# Altium PCB gnss_module_evaluation_shield_pcb.PcbDoc
Units mm, origin at the board's own origin, x right, y up, seen from the top; angles counter-clockwise.
Board outline 108.58 x 80 mm, 2 copper layers (Top Layer, Bottom Layer); 35 components, 33 nets, 116 pads, 132 vias.
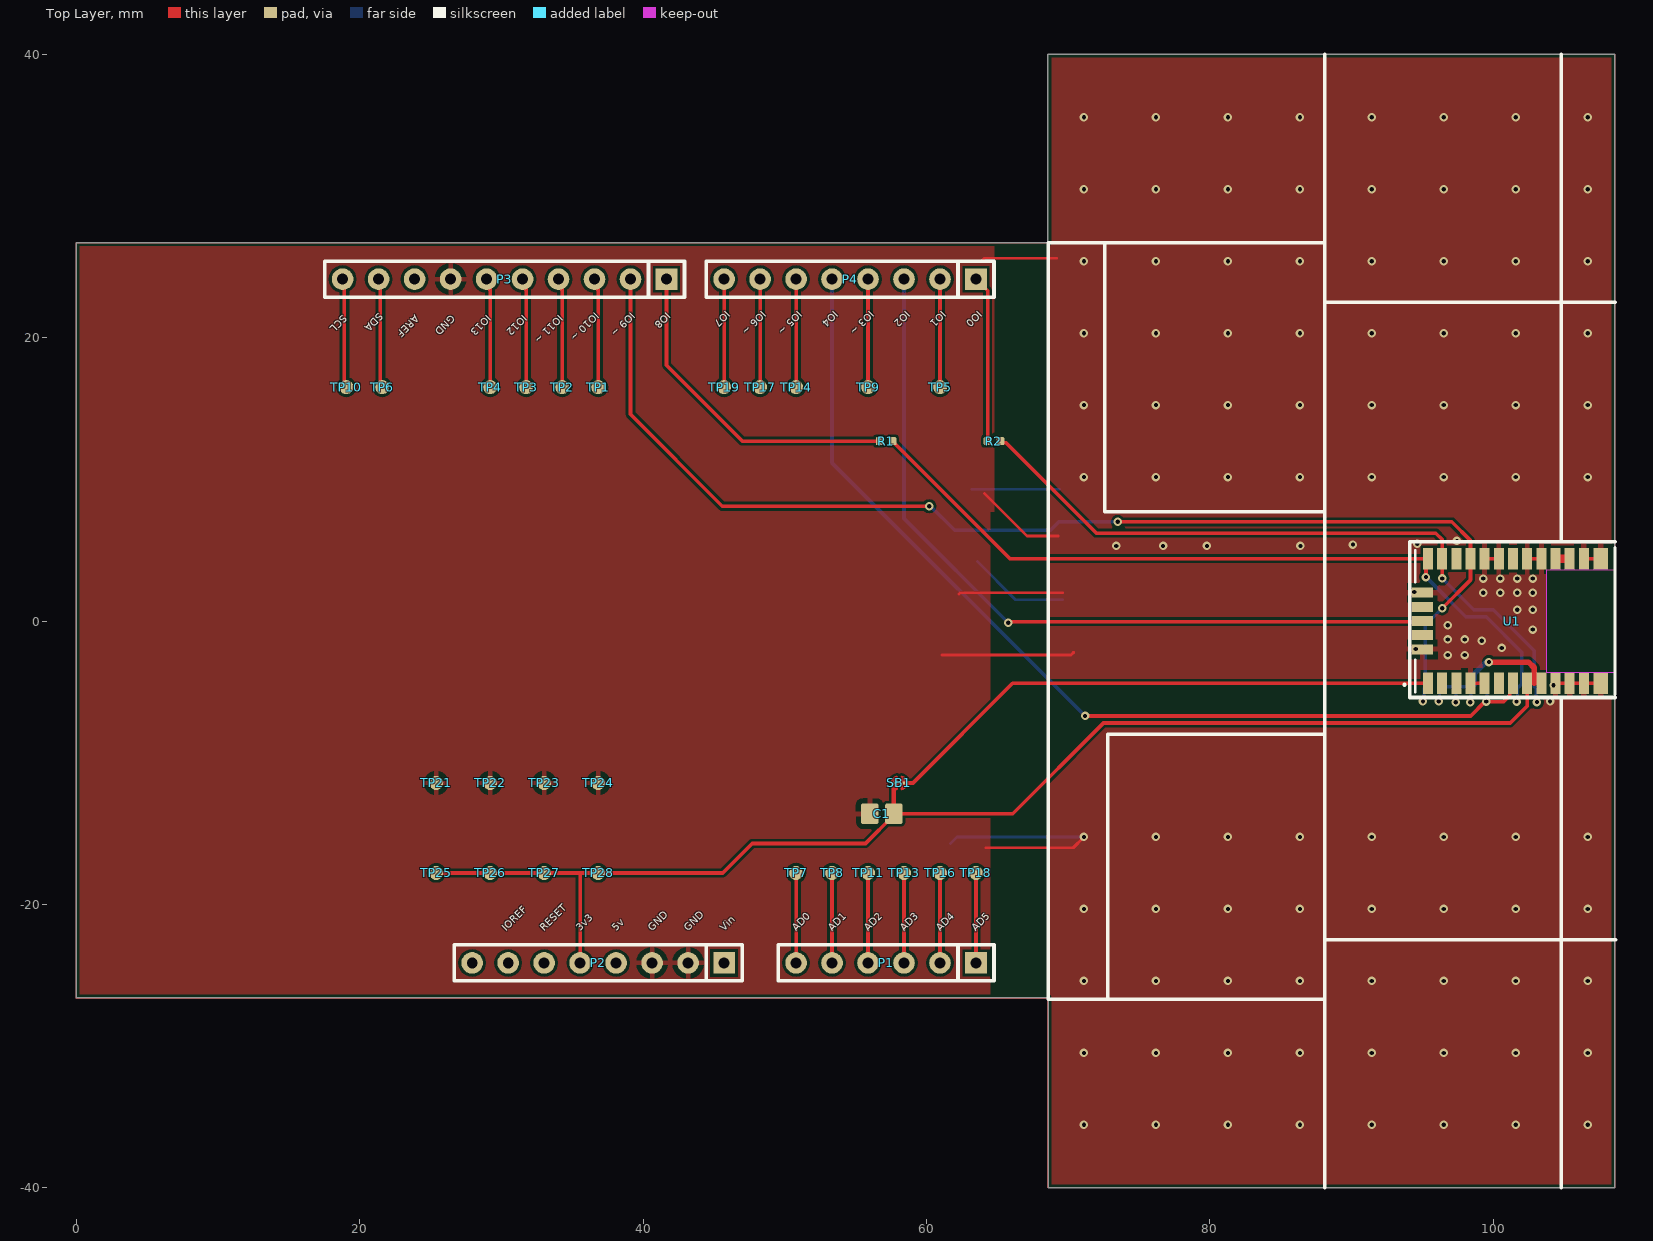
[diagram p0: Top Layer view]
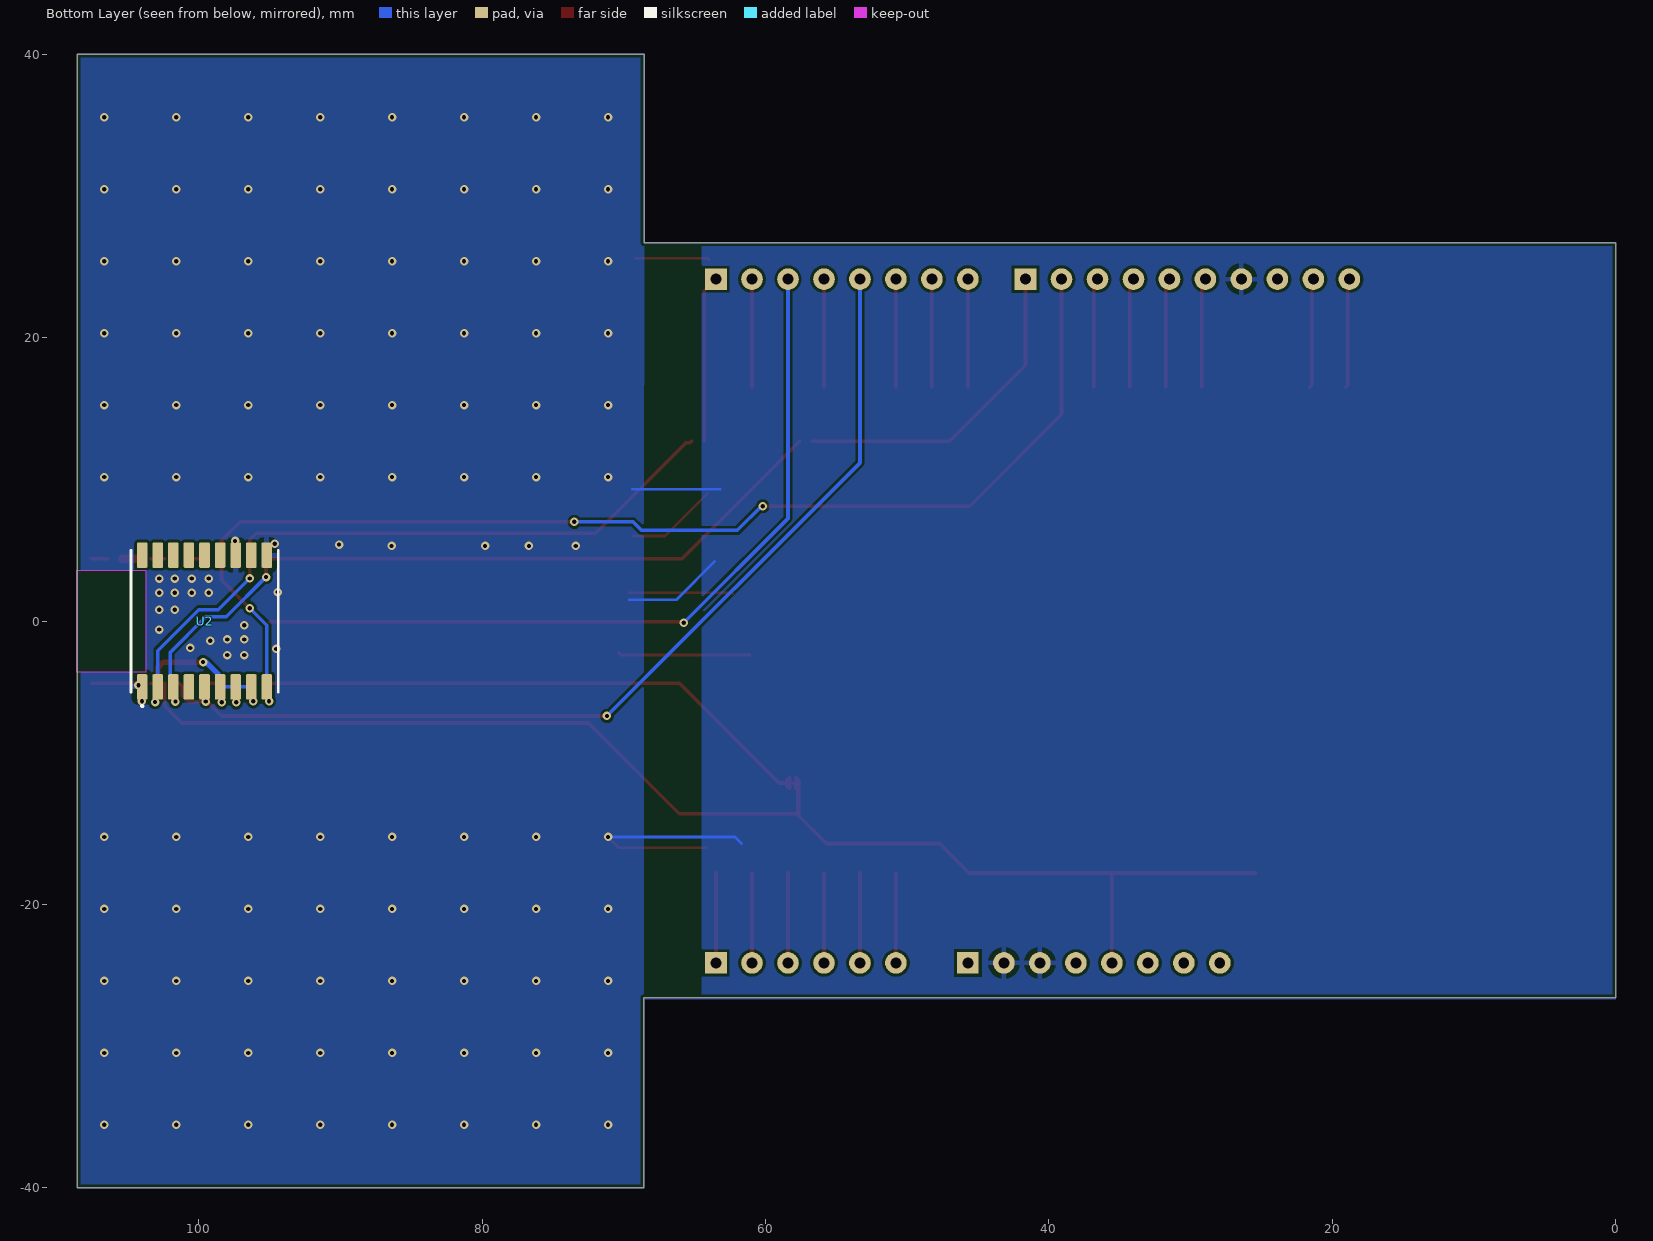
[diagram p1: Bottom Layer view, seen from below]
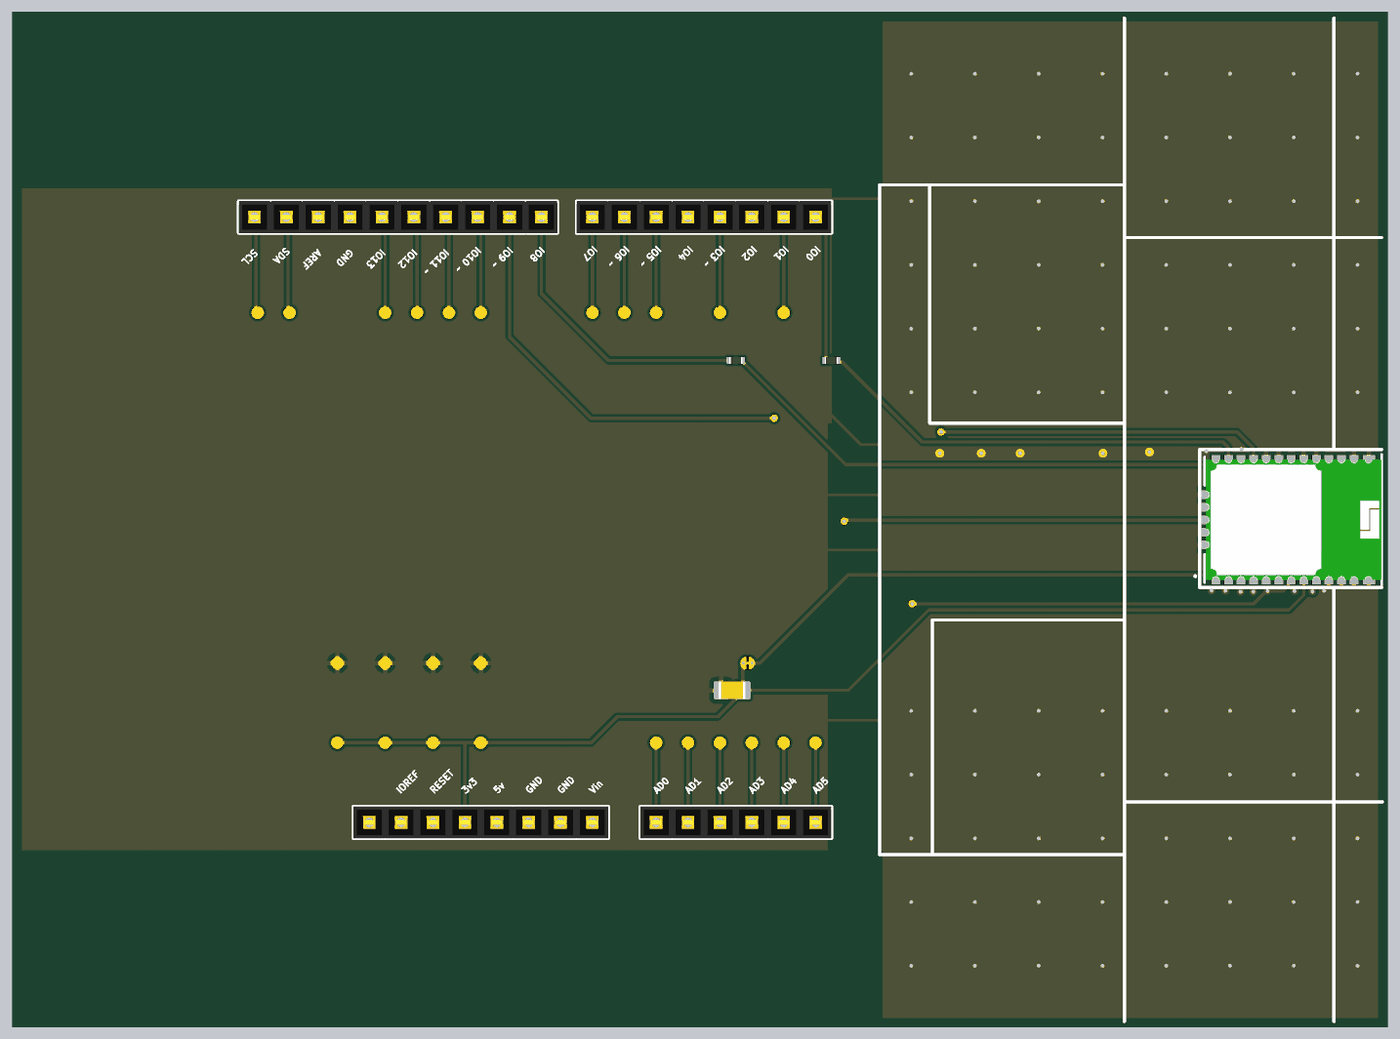
[diagram p2: 3D render of the assembled board from above, using the file's embedded part models]

## Layer stack, top to bottom
Top Solder: solder mask 0.0102, Solder Resist, Dk 3.5
Top Layer: signal copper 0.0356
Dielectric1: dielectric 0.32, FR-4, Dk 4.8
Bottom Layer: signal copper 0.0356
Bottom Solder: solder mask 0.0102, Solder Resist, Dk 3.5

## Board outline
0,-26.6 0,26.7 68.58,26.7 68.58,40 108.58,40 108.58,-40 68.6,-40 68.6,-26.6

## Design rules (kind name [scope] priority, off if disabled: settings)
AcuteAngle [All] p1: minimum=3.50000000000000E+0001 checktracksonly=FALSE
BoardOutlineClearance "BoardOutlineClearance 1" [All] p1: gap=0.25 ignorepadtopadclearanceinfootprint=FALSE except(0: Arc-SplitContinuation Track-SplitContinuation SMDPad-SplitContinuation THPad-SplitContinuation Via-SplitContinuation Fill-SplitContinuation Poly-SplitContinuation Region-SplitContinuation Text-SplitContinuation) // Milling
BoardOutlineClearance "BoardOutlineClearance 2" [All] p2: gap=0.4 ignorepadtopadclearanceinfootprint=FALSE except(0: Arc-SplitContinuation Track-SplitContinuation SMDPad-SplitContinuation THPad-SplitContinuation Via-SplitContinuation Fill-SplitContinuation Poly-SplitContinuation Region-SplitContinuation Text-SplitContinuation) // V-Cut
Clearance "Clearance 3 Oz" [All] p1 off: gap=0.35 ignorepadtopadclearanceinfootprint=FALSE except(0.25: Arc-Hole Track-Hole SMDPad-Hole THPad-Hole Via-Hole Fill-Hole Poly-Hole Region-Hole Text-Hole)
Clearance "Clearance 2 Oz" [All] p2 off: gap=0.3 ignorepadtopadclearanceinfootprint=FALSE except(0.25: Arc-Hole Track-Hole SMDPad-Hole THPad-Hole Via-Hole Fill-Hole Poly-Hole Region-Hole Text-Hole)
Clearance Clearance-Extension [OnLayer('Keep-Out Layer')] p3: gap=0 ignorepadtopadclearanceinfootprint=FALSE // Standart
Clearance "Clearance-1 1 Oz" [All] p4: gap=0.2 ignorepadtopadclearanceinfootprint=FALSE except(0.25: Arc-Hole Track-Hole SMDPad-Hole THPad-Hole Via-Hole Fill-Hole Poly-Hole Region-Hole Text-Hole) // Standart
Clearance "Clearance-2 1 Oz" [All] p5: gap=0.15 ignorepadtopadclearanceinfootprint=FALSE except(0.2: Arc-Fill Arc-Poly Track-Fill Track-Poly SMDPad-Fill SMDPad-Poly THPad-Fill THPad-Poly Via-Fill Via-Poly Fill-Fill Fill-Poly Poly-Poly; 0.25: Arc-Hole Track-Hole SMDPad-Hole THPad-Hole Via-Hole Fill-Hole Poly-Hole Region-Hole Text-Hole) // Advance
Clearance "Clearance-1 1/2 Oz" [All] p6: gap=0.125 ignorepadtopadclearanceinfootprint=FALSE except(0.2: Arc-Fill Arc-Poly Track-Fill Track-Poly SMDPad-SMDPad SMDPad-Fill SMDPad-Poly THPad-Fill THPad-Poly Via-Fill Via-Poly Fill-Fill Fill-Poly Poly-Poly Poly-Region Poly-Text; 0.25: Arc-Hole Track-Hole SMDPad-Hole THPad-Hole Via-Hole Fill-Hole Poly-Hole Region-Hole Text-Hole) // Standart
Clearance "Clearance-2 1/2 Oz" [All] p7: gap=0.1 ignorepadtopadclearanceinfootprint=FALSE except(0.15: Arc-Fill Arc-Poly Track-Fill Track-Poly SMDPad-SMDPad SMDPad-Fill SMDPad-Poly THPad-Fill THPad-Poly Via-Fill Via-Poly Fill-Fill Fill-Poly Poly-Poly Poly-Region Poly-Text; 0.25: Arc-Hole Track-Hole SMDPad-Hole THPad-Hole Via-Hole Fill-Hole Poly-Hole Region-Hole Text-Hole) // Advance
DiffPairsRouting "DiffPairsRouting 1 Oz" [All] p1: maxlimit=0.254 minlimit=0.2 mostfreqgap=0.254 toplayer_minwidth=0.2 toplayer_maxwidth=0.381 toplayer_prefwidth=0.381 bottomlayer_minwidth=0.2 bottomlayer_maxwidth=0.381 bottomlayer_prefwidth=0.381 maxuncoupledlength=12.7
DiffPairsRouting "DiffPairsRouting 1/2 Oz" [All] p2: maxlimit=0.254 minlimit=0.1 mostfreqgap=0.254 toplayer_minwidth=0.1 toplayer_maxwidth=0.381 toplayer_prefwidth=0.381 bottomlayer_minwidth=0.1 bottomlayer_maxwidth=0.381 bottomlayer_prefwidth=0.381 maxuncoupledlength=12.7
HoleSize "Minimum HoleSize" [IsPad] p1: absolutevalues=TRUE maxlimit=5.9 minlimit=0.6 maxpercent=80.000 minpercent=20.000
HoleSize "Minimum HoleSize VIA 1" [IsVia] p2: absolutevalues=TRUE maxlimit=5.9 minlimit=0.3 maxpercent=80.000 minpercent=20.000 // Standart
HoleSize "Minimum HoleSize VIA 2" [IsVia] p3: absolutevalues=TRUE maxlimit=5.9 minlimit=0.2 maxpercent=80.000 minpercent=20.000 // Advance
HoleToHoleClearance Hole2HoleClearance [All] p1: gap=0.25 allowstackedmicrovias=FALSE
MinimumAnnularRing "Minimum AR VIA Standart" [IsVia] p1: minimumring=0.15
MinimumAnnularRing "Minimum AR PAD Standart" [IsPAD] p2: minimumring=0.2
MinimumAnnularRing "Minimum AR VIA Advance" [IsVia] p3: minimumring=0.1
MinimumAnnularRing "Minimum AR PAD Advance" [IsPAD] p4: minimumring=0.15
MinimumSolderMaskSliver "SolderMask Bridge Standart" [All] p1: minsoldermaskwidth=0.15 // All Masks
MinimumSolderMaskSliver "SolderMask Bridge Advance" [All] p2: minsoldermaskwidth=0.1 // Mask LDI
PlaneClearance "PlaneClearance 3 Oz" [All] p1: clearance=0.35
PlaneClearance "PlaneClearance 2 Oz" [All] p2: clearance=0.3
PlaneClearance "PlaneClearance 1 Oz" [All] p3: clearance=0.2
PlaneClearance "PlaneClearance-1 1/2 Oz" [All] p4: clearance=0.2 // Standart
PlaneClearance "PlaneClearance-2 1/2 Oz" [All] p5: clearance=0.15 // Advance
PlaneConnect "TermalConnect 3 Oz" [All] p1: planeconnectstyle=Relief reliefexpansion=0.2 reliefentries=4 reliefconductorwidth=0.35 reliefairgap=0.35 // Standart
PlaneConnect "TermalConnect 2 Oz" [All] p2: planeconnectstyle=Relief reliefexpansion=0.2 reliefentries=4 reliefconductorwidth=0.3 reliefairgap=0.3 // Standart
PlaneConnect "TermalConnect-1 1 Oz" [All] p3: planeconnectstyle=Relief reliefexpansion=0.2 reliefentries=4 reliefconductorwidth=0.2 reliefairgap=0.2 // Standart
PlaneConnect "TermalConnect-2 1 Oz" [All] p4: pad.planeconnectstyle=Relief pad.reliefexpansion=0.15 pad.reliefentries=4 pad.reliefconductorwidth=0.2 pad.reliefairgap=0.2 via.planeconnectstyle=Direct via.reliefexpansion=0.15 via.reliefentries=4 via.reliefconductorwidth=0.15 via.reliefairgap=0.15 // Advance
PlaneConnect "TermalConnect-1 1/2 Oz" [All] p5: planeconnectstyle=Relief reliefexpansion=0.2 reliefentries=4 reliefconductorwidth=0.2 reliefairgap=0.2 // Standart
PlaneConnect "TermalConnect-2 1/2 Oz" [All] p6: pad.planeconnectstyle=Relief pad.reliefexpansion=0.15 pad.reliefentries=4 pad.reliefconductorwidth=0.15 pad.reliefairgap=0.15 via.planeconnectstyle=Direct via.reliefexpansion=0.15 via.reliefentries=4 via.reliefconductorwidth=0.15 via.reliefairgap=0.15 // Advance
PolygonConnect PolygonConnectVia [IsVia] p1: connectstyle=Direct reliefconductorwidth=0.254 reliefentries=4 polygonreliefangle="90 Angle" airgapwidth=0.254
PolygonConnect "PolygonConnect 3 Oz" [All] p2: thpad.connectstyle=Relief thpad.reliefconductorwidth=0.35 thpad.reliefentries=4 thpad.polygonreliefangle="90 Angle" thpad.airgapwidth=0.35 smdpad.connectstyle=Relief smdpad.reliefconductorwidth=0.35 smdpad.reliefentries=4 smdpad.polygonreliefangle="90 Angle" smdpad.airgapwidth=0.35 via.connectstyle=Direct via.reliefconductorwidth=0.254 via.reliefentries=4 via.polygonreliefangle="90 Angle" via.airgapwidth=0.254
PolygonConnect "PolygonConnect 2 Oz" [All] p3: thpad.connectstyle=Relief thpad.reliefconductorwidth=0.3 thpad.reliefentries=4 thpad.polygonreliefangle="90 Angle" thpad.airgapwidth=0.3 smdpad.connectstyle=Relief smdpad.reliefconductorwidth=0.3 smdpad.reliefentries=4 smdpad.polygonreliefangle="90 Angle" smdpad.airgapwidth=0.3 via.connectstyle=Direct via.reliefconductorwidth=0.254 via.reliefentries=4 via.polygonreliefangle="90 Angle" via.airgapwidth=0.254
PolygonConnect "PolygonConnect-1 1 Oz" [All] p4: thpad.connectstyle=Relief thpad.reliefconductorwidth=0.2 thpad.reliefentries=4 thpad.polygonreliefangle="90 Angle" thpad.airgapwidth=0.2 smdpad.connectstyle=Relief smdpad.reliefconductorwidth=0.2 smdpad.reliefentries=4 smdpad.polygonreliefangle="90 Angle" smdpad.airgapwidth=0.2 via.connectstyle=Direct via.reliefconductorwidth=0.254 via.reliefentries=4 via.polygonreliefangle="90 Angle" via.airgapwidth=0.254 // Standart
PolygonConnect "PolygonConnect-2 1 Oz" [All] p5: thpad.connectstyle=Relief thpad.reliefconductorwidth=0.15 thpad.reliefentries=4 thpad.polygonreliefangle="90 Angle" thpad.airgapwidth=0.15 smdpad.connectstyle=Relief smdpad.reliefconductorwidth=0.15 smdpad.reliefentries=4 smdpad.polygonreliefangle="90 Angle" smdpad.airgapwidth=0.15 via.connectstyle=Direct via.reliefconductorwidth=0.254 via.reliefentries=4 via.polygonreliefangle="90 Angle" via.airgapwidth=0.254 // Advance
PolygonConnect "PolygonConnect-1 1/2 Oz" [All] p6: thpad.connectstyle=Relief thpad.reliefconductorwidth=0.15 thpad.reliefentries=4 thpad.polygonreliefangle="90 Angle" thpad.airgapwidth=0.2 smdpad.connectstyle=Relief smdpad.reliefconductorwidth=0.2 smdpad.reliefentries=4 smdpad.polygonreliefangle="90 Angle" smdpad.airgapwidth=0.2 via.connectstyle=Direct via.reliefconductorwidth=0.254 via.reliefentries=4 via.polygonreliefangle="90 Angle" via.airgapwidth=0.254 // Standart
PolygonConnect "PolygonConnect-2 1/2 Oz" [All] p7: thpad.connectstyle=Relief thpad.reliefconductorwidth=0.125 thpad.reliefentries=4 thpad.polygonreliefangle="90 Angle" thpad.airgapwidth=0.15 smdpad.connectstyle=Relief smdpad.reliefconductorwidth=0.125 smdpad.reliefentries=4 smdpad.polygonreliefangle="90 Angle" smdpad.airgapwidth=0.15 via.connectstyle=Direct via.reliefconductorwidth=0.254 via.reliefentries=4 via.polygonreliefangle="90 Angle" via.airgapwidth=0.254 // Advance
RoutingCorners [All] p1 off: cornerstyle=45-Degree minsetback=2.54 maxsetback=2.54
RoutingVias [All] p1: holewidth=0.3 width=0.6 viastyle="Through Hole" minholewidth=0.2 minwidth=0.4 maxholewidth=5.9 maxwidth=6.4
SilkToSilkClearance Silk2SilkClearance [All] p1 off: silktosilkclearance=0.15
SilkToSolderMaskClearance Silk2SolderMaskClearance [IsPad] p1 off: minsilkscreentomaskgap=0.15 clearancetoexposedcopper=TRUE
SolderMaskExpansion SolderMaskExpansion-1 [All] p1: expansion=0.05 istentingtop=FALSE // Standart
SolderMaskExpansion "SolderMaskExpansion LDI" [All] p2: expansion=0.025 istentingtop=FALSE // Advance
UnRoutedNet [All] p1: checkbadconnections=TRUE
Width "Width 3 Oz" [All] p1 off: maxlimit=10 minlimit=0.35 preferedwidth=0.4 checkconnectedcopper=TRUE
Width "Width 2 Oz" [All] p2 off: maxlimit=10 minlimit=0.3 preferedwidth=0.35 minimp=50.000000 maximp=50.000000 favimp=50.000000 checkconnectedcopper=TRUE
Width "Width 1 Oz" [All] p3: maxlimit=10 minlimit=0.15 preferedwidth=0.2 checkconnectedcopper=TRUE
Width "Width 1/2 Oz" [All] p4: maxlimit=10 minlimit=0.1 preferedwidth=0.125 checkconnectedcopper=TRUE
20 further rules are at their usual default settings.

## Components (designator, comment, footprint, x,y, rotation, side; value= is the part's Value field where it differs from the comment)
C1 "4.7uF" CAP0805 56.85,-13.6 r0 top
P1 "SSQ-106-03-G-S" "Header 6x1 8.5mm" 63.5,-24.13 r180 top
P2 "SSQ-108-03-G-S" "Header 8x1 8.5mm" 45.72,-24.13 r180 top
P3 "SSQ-110-03-G-S" "Header 10x1 8.5mm" 41.656,24.13 r180 top
P4 "SSQ-108-03-G-S" "Header 8x1 8.5mm" 63.5,24.13 r180 top
R1 "200 Ohms" R0402 57.15,12.7 r0 top
R2 "200 Ohms" R0402 64.77,12.7 r0 top
SB1 "*" SOLDERBRIDGE_SHORTED 58.082,-11.43 r0 top net-tie
TP1 "*" TP_1MM 36.83,16.51 r90 top
TP2 "*" TP_1MM 34.29,16.51 r90 top
TP3 "*" TP_1MM 31.75,16.51 r90 top
TP4 "*" TP_1MM 29.21,16.51 r90 top
TP5 "*" TP_1MM 60.96,16.51 r90 top
TP6 "*" TP_1MM 21.59,16.51 r90 top
TP7 "*" TP_1MM 50.8,-17.78 r90 top
TP8 "*" TP_1MM 53.34,-17.78 r90 top
TP9 "*" TP_1MM 55.88,16.51 r90 top
TP10 "*" TP_1MM 19.05,16.51 r90 top
TP11 "*" TP_1MM 55.88,-17.78 r90 top
TP13 "*" TP_1MM 58.42,-17.78 r90 top
TP14 "*" TP_1MM 50.8,16.51 r90 top
TP16 "*" TP_1MM 60.96,-17.78 r90 top
TP17 "*" TP_1MM 48.26,16.51 r90 top
TP18 "*" TP_1MM 63.5,-17.78 r90 top
TP19 "*" TP_1MM 45.72,16.51 r90 top
TP21 "*" TP_1MM 25.4,-11.43 r90 top
TP22 "*" TP_1MM 29.21,-11.43 r90 top
TP23 "*" TP_1MM 33.02,-11.43 r90 top
TP24 "*" TP_1MM 36.83,-11.43 r90 top
TP25 "*" TP_1MM 25.4,-17.78 r90 top
TP26 "*" TP_1MM 29.21,-17.78 r90 top
TP27 "*" TP_1MM 33.02,-17.78 r90 top
TP28 "*" TP_1MM 36.83,-17.78 r90 top
U1 "L96-M33" LCC-31 101.3,0 r0 top
U2 "Teseo-LIV3R" LCC-18 99.6,0 r90 bottom

## Footprints (in the part's own frame and the unit in brackets; to place one, negate y for a bottom-side part, rotate by r counter-clockwise, add the part's x,y. Pads: shape width x height; smd on the part's side, far side on the other; paste and mask are expansions set on the pad)
CAP0805 [mm]
  rrect25% 1.25x1.45 smd: 1(-0.85,0) 2(0.85,0)
  body extent -1.07,-0.7 1.07,0.7, height 0.95
"Header 6x1 8.5mm" [mil] "Stackable 6 pin header"
  rect 60x60 hole 30: 1(0,0)
  round 60 hole 30: 2(100,0) 3(200,0) 4(300,0) 5(400,0) 6(500,0)
  silkscreen extent -50,-50 550,50, body extent -50,-50 550,50, height 335
"Header 8x1 8.5mm" [mil] "Stackable 8 pin header"
  rect 60x60 hole 30: 1(0,0)
  round 60 hole 30: 2(100,0) 3(200,0) 4(300,0) 5(400,0) 6(500,0) 7(600,0) 8(700,0)
  silkscreen extent -50,-50 750,50, body extent -50,-50 750,50, height 335
"Header 10x1 8.5mm" [mil] "Stackable 10 pin header"
  rect 60x60 hole 30: 1(0,0)
  round 60 hole 30: 2(100,0) 3(200,0) 4(300,0) 5(400,0) 6(500,0) 7(600,0) 8(700,0) 9(800,0) 10(900,0)
  silkscreen extent -50,-50 950,50, body extent -50,-50 950,50, height 335
LCC-18 [mm] "LCC, 18-Pins, Body 9,70x10,10mmx2,33mm, Pitch 1,10mm, IPC Medium Density"
  rrect25% 1.8x0.75 smd mask+0.05: 1(-4.65,4.4) 2(-4.65,3.3) 3(-4.65,2.2) 4(-4.65,1.1) 5(-4.65,0) 6(-4.65,-1.1) 7(-4.65,-2.2) 8(-4.65,-3.3) 9(-4.65,-4.4) 10(4.65,-4.4) 11(4.65,-3.3) 12(4.65,-2.2) 13(4.65,-1.1) 14(4.65,0) 15(4.65,1.1) 16(4.65,2.2) 17(4.65,3.3) 18(4.65,4.4)
  silkscreen extent -6.05,-5.2 5,5.2, body extent -4.85,-5.05 4.85,5.05, height 2.2
LCC-31 [mm]
  rect 0.7x1.5 smd mask+0.05: 1(-5.9,-4.4) 2(-4.9,-4.4) 3(-3.9,-4.4) 4(-2.9,-4.4) 5(-1.9,-4.4) 6(-0.9,-4.4) 7(0.1,-4.4) 8(1.1,-4.4) 9(2.1,-4.4) 10(3.1,-4.4) 11(4.1,-4.4) 15(5.1,4.4) 16(4.1,4.4) 17(3.1,4.4) 18(2.1,4.4) 19(1.1,4.4) 20(0.1,4.4) 21(-0.9,4.4) 22(-1.9,4.4) 23(-2.9,4.4) 24(-3.9,4.4) 25(-4.9,4.4) 26(-5.9,4.4)
  rect 0.7x1.5 smd paste+0 mask+0.05: 12(5.1,-4.4)
  rect 1x1.5 smd mask+0.05: 13(6.3,-4.4) 14(6.3,4.4)
  rect 1.5x0.7 smd mask+0.05: 27(-6.3,2) 28(-6.3,1) 29(-6.3,0) 30(-6.3,-1) 31(-6.3,-2)
  Keep-Out Layer region: 2.45,-3.6 7.3,-3.6 7.3,3.6 2.45,3.6
  silkscreen extent -7.6,-5.2 7.3,5.2, body extent -6.7,-4.8 7.3,4.8, height 2.3
R0402 [mm]
  rrect25% 0.55x0.55 smd: 1(-0.45,0) 2(0.45,0)
  body extent -0.53,-0.28 0.53,0.28, height 0.4
SOLDERBRIDGE_SHORTED [mm]
  rect 0.2x0.2 smd: 1(-0.338,0) 2(0.338,0)
  round 0.2 smd paste-10: 1(-0.338,0) 2(0.338,0)
  Top Layer region: -0.102,-0.432 -0.178,-0.505 -0.296,-0.467 -0.361,-0.424 -0.434,-0.351 -0.488,-0.292 -0.546,-0.193 -0.574,-0.099 -0.569,0.122 -0.544,0.193 -0.46,0.33 -0.376,0.411 -0.284,0.469 -0.183,0.5 -0.132,0.483 -0.102,0.43
  Top Layer region: 0.102,0.432 0.178,0.505 0.296,0.467 0.361,0.424 0.434,0.351 0.488,0.292 0.546,0.193 0.574,0.099 0.569,-0.122 0.544,-0.193 0.46,-0.33 0.376,-0.411 0.284,-0.469 0.183,-0.5 0.132,-0.483 0.102,-0.43
  Top Layer lines w0.152: -0.178,-0.431 cw(c-0.068,0) -0.178,0.431 ; 0.178,-0.431 ccw(c0.068,0) 0.178,0.431
  Top Layer lines w0.203: -0.338,0 0.338,0
TP_1MM [mm]
  round 1 smd paste-1: 1(0,0)

## Part data
C1: library part GRM21BR71C475KE51L, "CAP CER 4.7UF 16V X7R 0805", Manufacturer="Murata Electronics", Operating temperature="-55 +125", PACKAGE=0805, Tolerance=10%, Added by="Morozov A. L.", Assembled=1, HelpURL=https://search.murata.co.jp/Ceramy/image/img/A01X/G101/ENG/GRM21BR71C475KE51-01.pdf, Part Number=GRM21BR71C475KE51L, Price=0.21, Released=01-12-2019
P1: "CONN RCPT 6POS 0.1 GOLD PCB / 6 Position Receptacle Connector 0.100\" (2.54mm) Through Hole Gold", Manufacturer="Samtech Inc.", Operating temperature="-55 +125", PACKAGE="Pitch 2.54", Added by="Morozov A. L.", Assembled=0, HelpURL=http://suddendocs.samtec.com/catalog_english/ssq_th.pdf, Part Number=SSQ-106-03-G-S, Price=1.38, Released=02-10-2021
P2 P4: "CONN RCP 8POS 0.1 GOLD PCB / 6 Position Receptacle Connector 0.100\" (2.54mm) Through Hole Gold", Manufacturer="Samtech Inc.", Operating temperature="-55 +125", PACKAGE="Pitch 2.54", Added by="Morozov A. L.", Assembled=0, HelpURL=http://suddendocs.samtec.com/catalog_english/ssq_th.pdf, Part Number=SSQ-108-03-G-S, Price=1.38, Released=02-10-2021
P3: "CONN RC 10POS 0.1 GOLD PCB / 6 Position Receptacle Connector 0.100\" (2.54mm) Through Hole Gold", Manufacturer="Samtech Inc.", Operating temperature="-55 +125", PACKAGE="Pitch 2.54", Added by="Morozov A. L.", Assembled=0, HelpURL=http://suddendocs.samtec.com/catalog_english/ssq_th.pdf, Part Number=SSQ-110-03-G-S, Price=1.38, Released=02-10-2021
R1 R2: library part RC0402FR-07200RL, "RES SMD 200 OHM 1% 1/16W 0402", Manufacturer=Yageo, Operating temperature="-55 +155", PACKAGE=0402, Tolerance=1%, Added by="Morozov A. L.", Assembled=1, HelpURL=https://www.yageo.com/upload/media/product/productsearch/datasheet/rchip/PYu-RC_Group_51_RoHS_L_10.pdf, Part Number=RC0402FR-07200RL, Price=0.1, Released=25-01-2020
SB1: library part "Solderbridge shorted", "Solder bridge shorted", Added by="Morozov A. L.", Assembled=0, Part Number="Solderbridge shorted", Price=-, Released=02-10-2021, Type="Solder bridge"
TP1 TP2 TP3 TP4 TP5 TP6 TP7 TP8 TP9 TP10 TP11 TP13 TP14 TP16 TP17 TP18 TP19 TP21 TP22 TP23 TP24 TP25 TP26 TP27 TP28: library part "Test Point 1MM", "Test point", Added by="Morozov A. L.", Assembled=1, Part Number="Test Point 1MM", Price=-, Released=17-02-2020, Type="Test point"
U1: "Navigation BeiDou, Galileo, GLONASS, GPS, GNSS Transceiver Module 1.561GHz, 1.575GHz, 1.602GHz Integrated, Chip Surface Mount", Manufacturer=Quectel, Operating temperature="-40 to 85", PACKAGE=LCC-31, Added by="Morozov A. L.", Assembled=0, HelpURL=https://www.quectel.com/product/gnss-l96/, Part Number=L96-M33, Price=-, Released=27-08-2021
U2: "BeiDou, GLONASS, GNSS, GPS 1.561GHz, 1.575MHz -163dBm   18-LCC (9.7x10.1)", Manufacturer=STMicroelectronics, Operating temperature="-40 to 85", PACKAGE=LCC-18, Added by="Morozov A. L.", Assembled=1, HelpURL=https://www.st.com/resource/en/datasheet/teseo-liv3r.pdf, Part Number=Teseo-LIV3R, Price=11.47, Released=29-11-2019

## Via types
v1: diameter 0.6, hole 0.3, Top Layer to Bottom Layer, tented both sides, 123 vias
v2: diameter 0.6, hole 0.3, Top Layer to Bottom Layer, 9 vias

## Nets (pads, with @x,y where several pads share a name; then routed paths per layer and width w, separated by ;. In a path a pad name is that pad's centre, name@x,y a point inside that pad or via, vN(x,y) a via of type N, cw(c..) or ccw(c..) an arc to the next point about the centre after c; other vN are vias at no path point)
5V: P2.4
AD0: P1.6 TP7.1 | length 6.3
  Top Layer w0.254: P1.6 TP7.1
AD1: P1.5 TP8.1 | length 6.3
  Top Layer w0.254: P1.5 TP8.1
AD2: P1.4 TP11.1 | length 6.3
  Top Layer w0.254: P1.4 TP11.1
AD3: P1.3 TP13.1 | length 6.3
  Top Layer w0.254: P1.3 TP13.1
AD4: P1.2 TP16.1 | length 6.3
  Top Layer w0.254: P1.2 TP16.1
AD5: P1.1 TP18.1 | length 6.3
  Top Layer w0.254: P1.1 TP18.1
AREF: P3.8
D0: P4.1 R2.1 | length 11.8
  Top Layer w0.254: P4.1 64.32,23.31 R2.1
D1: P4.2 TP5.1 | length 7.6
  Top Layer w0.254: TP5.1 P4.2
D3: P4.4 TP9.1 | length 7.6
  Top Layer w0.254: TP9.1 P4.4
D5: P4.6 TP14.1 | length 7.6
  Top Layer w0.254: TP14.1 P4.6
D6: P4.7 TP17.1 | length 7.6
  Top Layer w0.254: TP17.1 P4.7
D7: P4.8 TP19.1 | length 7.6
  Top Layer w0.254: TP19.1 P4.8
D8: P3.1 R1.1 | length 23.3
  Top Layer w0.254: P3.1 41.656,18.044 47,12.7 R1.1
D10: P3.3 TP1.1 | length 7.7
  Top Layer w0.254: P3.3 36.819,23.887 36.819,23.357 36.83,23.346 TP1.1
D11: P3.4 TP2.1 | length 7.7
  Top Layer w0.254: P3.4 34.279,23.887 34.279,23.357 34.29,23.346 TP2.1
D12: P3.5 TP3.1 | length 7.7
  Top Layer w0.254: P3.5 31.739,23.887 31.739,23.357 31.75,23.346 TP3.1
D13: P3.6 TP4.1 | length 7.7
  Top Layer w0.254: P3.6 29.199,23.887 29.199,23.357 29.21,23.346 TP4.1
GND: C1.1 P2.2 P2.3 P3.7 TP21.1 TP22.1 TP23.1 TP24.1 U1.4 U1.5 U1.10 U1.11 U1.12 U1.13 U1.14 U1.15 U1.18 U1.19 U1.21 U1.22 U1.27 U1.31 U2.1 U2.10 U2.12 | length 66
  Top Layer w0.2: 61.1,-2.4 70.2,-2.4 70.4,-2.2 ; 62.3,1.9 62.4,2 69.6,2 ; 64,25.5 64.1,25.6 69.2,25.6 ; 64.1,9 67.1,6 69.3,6 ; 64.2,-16 70.36,-16 v1(71.12,-15.24)
  Top Layer w0.254: U1.4 U1.5 ; U1.22 U1.21 ; U1.19 U1.18 ; U1.10 U1.11 U1.12 U1.13 ; U1.15 U1.14
  Bottom Layer w0.2: 61.7,-15.7 62.16,-15.24 v1(71.12,-15.24) ; 63.2,9.3 69.4,9.3 ; 63.6,4.2 66.3,1.5 69.6,1.5
  other v1: 71.12,-35.56 76.2,-35.56 81.28,-35.56 86.36,-35.56 91.44,-35.56 96.52,-35.56 101.6,-35.56 106.68,-35.56 71.12,-30.48 76.2,-30.48 81.28,-30.48 86.36,-30.48 91.44,-30.48 96.52,-30.48 101.6,-30.48 106.68,-30.48 71.12,-25.4 76.2,-25.4 81.28,-25.4 86.36,-25.4 91.44,-25.4 96.52,-25.4 101.6,-25.4 106.68,-25.4 71.12,-20.32 76.2,-20.32 81.28,-20.32 86.36,-20.32 91.44,-20.32 96.52,-20.32 101.6,-20.32 106.68,-20.32 76.2,-15.24 81.28,-15.24 86.36,-15.24 91.44,-15.24 96.52,-15.24 101.6,-15.24 106.68,-15.24 104.014,-5.657 104.267,-4.531 96.8,-2.4 98,-2.4 94.533,-1.973 100.6,-1.9 99.2,-1.4 96.8,-1.3 98,-1.3 102.8,-0.6 96.8,-0.3 101.7,0.8 102.8,0.8 99.3,2 100.5,2 101.7,2 102.8,2 94.433,2.041 99.3,3 100.5,3 101.7,3 102.8,3 94.634,5.459 97.442,5.651 71.12,10.16 76.2,10.16 81.28,10.16 86.36,10.16 91.44,10.16 96.52,10.16 101.6,10.16 106.68,10.16 71.12,15.24 76.2,15.24 81.28,15.24 86.36,15.24 91.44,15.24 96.52,15.24 101.6,15.24 106.68,15.24 71.12,20.32 76.2,20.32 81.28,20.32 86.36,20.32 91.44,20.32 96.52,20.32 101.6,20.32 106.68,20.32 71.12,25.4 76.2,25.4 81.28,25.4 86.36,25.4 91.44,25.4 96.52,25.4 101.6,25.4 106.68,25.4 71.12,30.48 76.2,30.48 81.28,30.48 86.36,30.48 91.44,30.48 96.52,30.48 101.6,30.48 106.68,30.48 71.12,35.56 76.2,35.56 81.28,35.56 86.36,35.56 91.44,35.56 96.52,35.56 101.6,35.56 106.68,35.56
  other v2: 73.4,5.3 76.7,5.3 79.8,5.3 86.4,5.3 90.1,5.4
IOREF: P2.7
NetP3_9: P3.9 TP6.1 | length 7.7
  Top Layer w0.254: P3.9 21.463,24.003 21.463,16.637 TP6.1
NetP3_10: P3.10 TP10.1 | length 7.7
  Top Layer w0.254: P3.10 18.923,24.003 18.923,16.637 TP10.1
NetSB1_2: SB1.2 U1.1 | length 39.9
  Top Layer w0.254: SB1.2@58.42,-11.43 59.052,-11.43 66.082,-4.4 U1.1
NetU1_16: U1.16 U1.17 | length 1
  Top Layer w0.6: U1.17 U1.16
PPS_GNSS: P4.3 U1.29 | length 56.6
  Top Layer w0.254: v2(65.778,-0.122) 65.856,-0.044 U1.29@95,-0.044
  Bottom Layer w0.254: P4.3 58.42,7.236 v2(65.778,-0.122)
RESET: P2.6
RESET_GNSS: P3.2 U1.23 U2.9 | length 85.7
  Top Layer w0.254: P3.2 39.116,14.584 45.6,8.1 v2(60.2,8.1) ; v2(73.5,7) 97.08,7 98.4,5.68 U1.23 98.4,2.9 v1(96.4,0.9)
  Bottom Layer w0.2: v1(95.041,-5.654) 95.117,-5.578 95.117,-4.733 U2.9
  Bottom Layer w0.254: v2(60.2,8.1) 60.294,8.1 61.994,6.4 68.758,6.4 69.358,7 v2(73.5,7) ; U2.9 95.2,-0.3 v1(96.4,0.9)
RXD_GNSS: R1.2 U1.26 U2.3 | length 55.2
  Top Layer w0.254: R1.2 65.9,4.4 U1.26 95.436,4.364 95.26,4.189 v1(95.26,3.102)
  Bottom Layer w0.2: v1(101.656,-5.687) 101.728,-5.616 101.728,-4.722 U2.3
  Bottom Layer w0.254: v1(95.26,3.102) 98.07,0.292 99.508,0.292 102.021,-2.221 102.021,-4.429 U2.3
TXD_GNSS: R2.2 U1.25 U2.2 | length 49.1
  Top Layer w0.254: R2.2 65.35,12.57 65.63,12.57 72,6.2 95.951,6.2 96.4,5.751 U1.25 96.405,4.395 96.405,3.016 v1(96.411,3.011)
  Bottom Layer w0.2: U2.2 103.018,-4.768 103.018,-5.642 v1(103.094,-5.718)
  Bottom Layer w0.254: v1(96.411,3.011) 98.621,0.8 100,0.8 102.9,-2.1 U2.2
VDD: C1.2 P2.5 SB1.1 TP25.1 TP26.1 TP27.1 TP28.1 U1.8 U1.9 U2.6 U2.7 U2.8 | length 105.4
  Top Layer w0.2: U1.8 102.9,-4.4 U1.9
  Top Layer w0.254: TP25.1 TP26.1 TP27.1 35.56,-17.78 ; P2.5 35.56,-17.78 ; C1.2@57.7,-13.7 55.7,-15.7 47.7,-15.7 45.62,-17.78 TP28.1 35.56,-17.78 ; C1.2 66.1,-13.6 72.5,-7.2 101.2,-7.2 102.4,-6 U1.8
  Top Layer w0.3: C1.2@57.7,-13.7 C1.2 57.7,-11.474 SB1.1@57.744,-11.43
  Top Layer w0.4: v1(99.7,-2.9) 102.5,-2.9 102.9,-3.3 102.9,-4.4
  Bottom Layer w0.2: v1(96.161,-5.667) 96.231,-5.597 96.231,-4.719 U2.8 ; v1(97.364,-5.74) 97.382,-5.722 97.382,-4.668 U2.7 ; v1(98.378,-5.74) 98.439,-5.679 98.439,-4.711 U2.6
  Bottom Layer w0.254: U2.8 U2.7 U2.6
  Bottom Layer w0.4: U2.6 98.675,-4.475 98.675,-3.713 99.488,-2.9 v1(99.7,-2.9)
VIN: P2.1
WAKEUP_GNSS: P4.5 U1.7 U2.5 | length 70.8
  Top Layer w0.254: v2(71.2,-6.7) 98.415,-6.7 99.431,-5.684 v1(99.513,-5.684) 100.755,-5.684 101.177,-5.262 101.177,-4.623 U1.7
  Bottom Layer w0.2: v1(99.513,-5.684) 99.556,-5.64 99.556,-4.694 U2.5
  Bottom Layer w0.254: P4.5 53.34,11.16 v2(71.2,-6.7)
pads on no net: P2.8 U1.2 U1.3 U1.6 U1.20 U1.24 U1.28 U1.30 U2.4 U2.11 U2.13 U2.14 U2.15 U2.16 U2.17 U2.18

## Polygon pours and split planes (outlines as drawn)
no net on Top Layer "NONET_L01_P001" (solid, remove dead copper, pour order 1): 0,-26.67 0,26.7 68.58,26.7 68.58,40 108.58,40 108.58,-40 68.58,-40 68.58,-26.67
GND on Top Layer "GND_L01_P000" (solid, remove dead copper, pour order 0): 0,-26.67 0,26.67 68.6,27.22 68.58,40 108.58,40 108.58,-40 68.58,-40 68.6,-26.9
GND on Bottom Layer "GND_L02_P003" (solid, remove dead copper, pour order 3): 0,-26.67 0,26.67 68.58,26.7 68.58,40 108.58,40 108.58,-40 68.58,-40 68.58,-26.67
no net on Bottom Layer "NONET_L02_P002" (solid, remove dead copper, pour order 2): 0,-26.67 0,26.67 68.58,26.67 68.58,40 108.58,40 108.58,-40 68.58,-40 68.58,-26.67

## Other copper
Top Layer:
  pour cut-out: 64.5,-8 64.5,7.7 68.6,7.7 68.6,-8.1
  pour cut-out: 68.6,-26.6 68.58,-8.12 68.6,-8.1 68.5,-8 64.5,-8 64.5,-26.6
  pour cut-out: 68.58,26.7 68.6,26.68 68.6,7.7 65.8,7.7 64.8,7.7 64.8,26.7
Bottom Layer:
  pour cut-out: 68.58,26.67 68.55,26.7 64.5,26.7 64.5,-26.6 64.503,-26.597 68.585,-26.597

## Silkscreen, mask and mechanical layers (free items; w line width, h text height)
Top Overlay:
  lines w0.254: 72.6,26.7 72.6,7.7 88.1,7.7 ; 72.8,-26.6 72.8,-8 88.1,-8 ; 88.1,-26.7 68.6,-26.7 68.6,26.7 88.1,26.7 ; 88.102,-39.998 88.102,-22.498 ; 88.102,39.998 88.102,22.498 ; 104.8,-40 104.8,-5.4 ; 104.8,5.6 104.8,40 ; 108.6,-5.4 94.1,-5.4 94.1,5.6 108.6,5.6 ; 108.6,22.5 88.6,22.5 88.104,22.5 88.102,22.498 ; 108.65,-22.498 88.102,-22.498 ; 88.102,-22.498 88.102,22.498
  text "IO7" at 45.847,21.918 h0.51 r225
  text "IO6 ~" at 48.387,21.918 h0.51 r225
  text "IO5 ~" at 50.927,21.918 h0.51 r225
  text "IO4" at 53.467,21.918 h0.51 r225
  text "IO3 ~" at 56.007,21.918 h0.51 r225
  text "IO2" at 58.547,21.918 h0.51 r225
  text "IO1" at 61.087,21.918 h0.51 r225
  text "IO0" at 63.627,21.918 h0.51 r225
  text "IO10 ~" at 36.576,21.844 h0.51 r225
  text "IO9 ~" at 39.116,21.844 h0.51 r225
  text "IO8" at 41.656,21.844 h0.51 r225
  text "SDA" at 21.336,21.791 h0.51 r225
  text "SCL" at 18.796,21.664 h0.51 r225
  text "AREF" at 23.876,21.664 h0.51 r225
  text "GND" at 26.416,21.664 h0.51 r225
  text "IO13" at 28.956,21.664 h0.51 r225
  text "IO12" at 31.496,21.664 h0.51 r225
  text "IO11 ~" at 34.036,21.664 h0.51 r225
  text "IOREF" at 30.353,-21.918 h0.51 r45
  text "RESET" at 33.02,-21.918 h0.51 r45
  text "3v3" at 35.56,-21.918 h0.51 r45
  text "5v" at 38.1,-21.918 h0.51 r45
  text "GND" at 40.64,-21.918 h0.51 r45
  text "GND" at 43.18,-21.918 h0.51 r45
  text "Vin" at 45.72,-21.918 h0.51 r45
  text "AD0" at 50.8,-21.918 h0.51 r45
  text "AD1" at 53.34,-21.918 h0.51 r45
  text "AD2" at 55.88,-21.918 h0.51 r45
  text "AD3" at 58.42,-21.918 h0.51 r45
  text "AD4" at 60.96,-21.918 h0.51 r45
  text "AD5" at 63.5,-21.918 h0.51 r45
Board:
  the board outline again, w1
Route Tool Path:
  lines w0.254: 93.859,-5.762 104.8,-5.762 104.8,5.762 93.859,5.762 93.859,-5.762